# EAGLE board PM_DC_v0.4DXF (EAGLE 9.6.2)

Size 35 x 22.86 mm. Coordinates in mm from the lower left corner, seen from the top.
Outline: 2,0 34,0 arc90 35,1 35,21.86 arc90 34,22.86 1,22.86 arc90 0,21.86 0,2 2,0
Copper layers (1*16): Top 0.035mm / dielectric 1.5mm / Bottom 0.035mm
Design rules "default *": minimum track width 6mil, minimum drill 8mil, track to track 8mil, track to pad 6mil, pad to pad 6mil, via to via 6mil, smd to smd 6mil, copper to edge 20mil, drill to drill 6mil, minimum pad ring 4mil, minimum via ring 4mil, stop-mask expansion 4mil, vias tented up to drill 20mil, thermal gap 10mil
Net classes: 0 default: width 0.152 mm, drill 0.203 mm, clearance 0.152 mm; 1 power: width 0.254 mm, drill 0.61 mm, clearance 0.203 mm; 3 BAT: clearance 0.203 mm; 4 3V3: width 0.305 mm, clearance 0.508 mm; 6 +3V3: width 0.203 mm, clearance 0.152 mm

## Footprints (pad centres in the part's own frame; a part is rotated, then mirrored left to right if it is on the bottom)
C0402 = smd 0.45 x 0.6: 1 -0.47,0; 2 0.47,0
C0603_B = smd 0.711 x 1.041: 1 -0.749,0; 2 0.749,0
C0402_B = smd 0.457 x 0.61: 1 -0.483,0; 2 0.483,0
C0805 = smd 0.85 x 1.3: 1 -0.8,0; 2 0.85,0
C1206 = smd 1.1 x 1.65: 1 -1.35,0; 2 1.35,0
C-0402 = smd 0.45 x 0.55: 1 -0.47,0; 2 0.47,0
SMADIODE = smd 2.54 x 2.54: A 2.349,0; C -2.349,0
1X13-CASTELLATED = drill 1.016 pad 1.778: 1 0,-15.24; 2 0,-12.7; 3 0,-10.16; 4 0,-7.62; 5 0,-5.08; 6 0,-2.54; 7 0,0; 8 0,2.54; 9 0,5.08; 10 0,7.62; 11 0,10.16; 12 0,12.7; 13 0,15.24 | drill 0.635 pad 1.016: @1 1.27,-15.24; @2 1.27,-12.7; @3 1.27,-10.16; @4 1.27,-7.62; @5 1.27,-5.08; @6 1.27,-2.54; @7 1.27,0; @8 1.27,2.54; @9 1.27,5.08; @10 1.27,7.62; @11 1.27,10.16; @12 1.27,12.7; @13 1.27,15.24
1X12-CASTELLATED = drill 1.016 pad 1.778: 1 0,-13.97; 2 0,-11.43; 3 0,-8.89; 4 0,-6.35; 5 0,-3.81; 6 0,-1.27; 7 0,1.27; 8 0,3.81; 9 0,6.35; 10 0,8.89; 11 0,11.43; 12 0,13.97 | drill 0.635 pad 1.016: @1 1.27,-13.97; @2 1.27,-11.43; @3 1.27,-8.89; @4 1.27,-6.35; @5 1.27,-3.81; @6 1.27,-1.27; @7 1.27,1.27; @8 1.27,3.81; @9 1.27,6.35; @10 1.27,8.89; @11 1.27,11.43; @12 1.27,13.97
INDUCTOR-2520 = smd 0.85 x 2: 1 -0.83,0; 2 0.83,0
INDUCTOR-4040 = smd 1.65 x 2.3: P$1 -1.65,0; P$2 1.65,0
R0402_B = smd 0.457 x 0.61: 1 -0.483,0; 2 0.483,0
R-0402S = smd 0.45 x 0.55: 1 -0.47,0; 2 0.47,0
R0402 = smd 0.6 x 0.6: 1 -0.525,0; 2 0.525,0
SO_POWERPAD_8 = smd 0.8 x 2: 1 -1.905,-2.775; 2 -0.635,-2.775; 3 0.635,-2.775; 4 1.905,-2.775; 5 1.905,2.775; 6 0.635,2.775; 7 -0.635,2.775; 8 -1.905,2.775 | smd 3.5 x 2.6: EP 0,0
SOTFL50P160X60-6N = smd 0.475 x 0.3: 1 -0.838,0.5; 2 -0.838,0; 3 -0.838,-0.5; 4 0.838,-0.5; 5 0.838,0; 6 0.838,0.5
SOT-23-6 = smd 1.27 x 0.508: 1 -1.27,0.953; 2 -1.27,0; 3 -1.27,-0.953; 4 1.27,-0.953; 5 1.27,0; 6 1.27,0.953
TP_2.33X1.37 = smd 1.37 x 2.33: 1 0,0

## Placement (x,y rotation side)
C1  0.1uF  [C0402]  25.55,7.71 180 top
C2  10uF  [C0603_B]  10.23,8.41 180 top
C3  33pF  [C0402_B]  3.68,9.76 0 top
C4  0.027uF  [C0402]  27.89,17.1 90 top
C5  22UF  [C0805]  16.37,9.92 180 top
C6  0.1uF  [C0402_B]  10.05,9.61 0 top
C7  0.1uF  [C0402_B]  3.68,12.86 0 top
C8  NC-33pF  [C0402]  30.69,17.1 90 top
C9  0.1uF  [C0402_B]  30.95,6.8 180 top
C10  1000pF  [C0402_B]  28.39,5.48 0 top
C11  0.1uF  [C0402_B]  16.44,8.2 0 top
C12  1000pF  [C0402_B]  19.43,8.07 180 top
C13  680pF  [C0402_B]  7.15,13.36 0 top
C14  10uF  [C0805]  4.12,14.4 180 top
C15  100uF  [C1206]  4.5,16.5 180 top
C16  22uF  [C0603_B]  31.12,5.48 0 top
C17  100uF  [C1206]  20.23,9.79 0 top
C18  100pF  [C0402_B]  3.68,11.83 0 top
C19  1000pF  [C0402_B]  10.05,10.68 0 top
C20  100pF  [C0402_B]  10.05,11.7 0 top
C21  1nF  [C0402_B]  3.68,10.79 0 top
C22  1000pF,25V  [C0402]  6.02,5.23 180 top
C23  0.1uF  [C-0402]  7.97,5.23 0 top
C24  10pF  [C0402_B]  28.39,6.8 0 top
C25  10pF  [C0402_B]  19.43,6.89 180 top
D2  5A/0.55V  [SMADIODE]  24.63,13.4 270 top
J1  M13PTH-CST-R  [1X13-CASTELLATED]  17.78,21.59 90 top
J2  M12PTH-CST-R  [1X12-CASTELLATED]  19.05,1.27 270 top
L1  1.5uH  [INDUCTOR-2520]  9.14,16.46 180 top
L4  2.2uH  [INDUCTOR-4040]  18.8,14.32 270 top
R1  44.2K  [R0402_B]  7.15,11.28 180 top
R2  12K  [R-0402S]  25.55,5.77 180 top
R3  76.8K  [R-0402S]  28.83,17.1 90 top
R4  100K  [R-0402S]  29.74,17.1 90 top
R5  44.2K  [R-0402S]  31.63,17.1 270 top
R6  100K  [R0402]  11.84,6.02 270 top
R7  10K  [R0402]  9.58,6.02 270 top
R8  12K  [R-0402S]  25.55,6.72 0 top
R9  0R  [R0402_B]  7.15,12.31 0 top
R11  10K  [R0402_B]  11.02,13.54 90 top
R12  10K/NC  [R0402]  10.7,6.02 270 top
R58  200K  [R0402_B]  7.15,14.39 0 top
U2  LMR14030  [SO_POWERPAD_8]  29.64,11.86 0 top
U3  MP1601GTF-Z  [SOTFL50P160X60-6N]  9.42,13.59 90 top
U5  TPS22918  [SOT-23-6]  6.98,8.21 270 top
U$1  TP  [TP_2.33X1.37]  10.5,11.43 0 bottom
U$2  TP  [TP_2.33X1.37]  2.5,11.43 0 bottom
U$4  TP  [TP_2.33X1.37]  26.5,11.43 0 bottom
U$5  TP  [TP_2.33X1.37]  18.5,11.43 0 bottom

## Library data of the parts
C1 C4 C5 C8 C14 C15 C17 R2-R5 R8 U5 = particle SZ
C2 C16 = Bretts-Spark-Library
C3 C6 C7 C9-C13 C18-C21 C24 C25 J1 J2 L1 R1 R9 R58 U$1 U$2 U$4 U$5 = Particle
C22 = particle SZ; ITEM_NAME: CAP CER 100PF 50V C0G/NP0 0603 5%; ITEM_NUMBER: PT-200458
C23 = particle SZ; ITEM_NAME: 0.1UF 16V X7R 0402 10%; ITEM_NUMBER: PT-200649
D2 U2 = particle-studios
L4 = Particle; ITEM_NAME: FIXED IND 1UH 5.8A 26 MOHM SMD 4020; ITEM_NUMBER: 155-00005
R6 = particle SZ; ITEM_NAME: RES SMD 1M OHM 1% 1/16W 0402; ITEM_NUMBER: PT-201084
R7 R12 = particle SZ; ITEM_NAME: 10K OHM 5% 1/16W 0402; ITEM_NUMBER: PT-200004
R11 = Spark
U3 = MP1601GTF-Z; DESCRIPTION: Conv DC-DC Single Step Down 2.3V to 5.5V 6-Pin SOT-563 T/R - Tape and Reel; HEIGHT: 0.6mm; MANUFACTURER_NAME: Monolithic Power Systems (MPS); MANUFACTURER_PART_NUMBER: MP1601GTF-Z

## Nets
3V3_AUX: C23.1 J2.2 J2.@2 R7.1 R12.1 U5.6
+3V3: C3.2 C7.2 C13.1 C14.1 C15.1 C18.2 C21.2 J2.1 J2.@1 L1.2 R58.1 U3.6 U5.1
EN_AUX: J2.7 J2.@7 R6.1 U5.3
ENABLE: J1.13 J1.@13 R8.1 U2.3
FB: C13.2 R1.1 R9.2 U3.1
GND: C2.2 C3.1 C4.2 C5.2 C6.1 C7.1 C9.1 C10.1 C11.1 C12.1 C14.2 C15.2 C16.2 C17.2 C18.1 C19.1 C20.1 C21.1 C22.2 C23.2 C24.1 C25.1 D2.A J1.9 J1.10 J1.@9 J1.@10 J2.9 J2.10 J2.@9 J2.@10 R1.2 R2.1 R5.1 R6.2 R12.2 U2.7 U2.EP U3.2 U5.2 U$1.1 U$2.1 U$4.1 U$5.1
N$1: R7.2 U5.5
N$2: C8.1 R4.1 R5.2 U2.5
N$3: R11.2 U3.5
N$4: R9.1 R58.2
N$8: C4.1 U2.6
N$9: C1.2 D2.C L4.P$1 U2.8
N$10: C1.1 U2.1
N$11: R2.2 U2.4
N$12: R3.1 R4.2
N$18: C22.1 U5.4
SW: L1.1 U3.4
VCC: C2.1 C5.1 C6.2 C8.2 C11.2 C12.2 C17.1 C19.2 C20.2 C25.2 J2.5 J2.6 J2.@5 J2.@6 L4.P$2 R3.2 R11.1 U3.3
VIN: C9.2 C10.2 C16.1 C24.2 J2.11 J2.12 J2.@11 J2.@12 R8.2 U2.2

## Tracks (layer width: path | path; a pad name or v marks a point on that pad's centre or on a via)
3V3_AUX  (5 unrouted)
+3V3  (12 unrouted)
EN_AUX  (3 unrouted)
ENABLE  (3 unrouted)
FB  (3 unrouted)
GND  (43 unrouted)
N$1  (1 unrouted)
N$2  (3 unrouted)
N$3  (1 unrouted)
N$4  (1 unrouted)
N$8  (1 unrouted)
N$9  (3 unrouted)
N$10  (1 unrouted)
N$11  (1 unrouted)
N$12  (1 unrouted)
N$18  (1 unrouted)
SW  (1 unrouted)
VCC  (17 unrouted)
VIN  (9 unrouted)